# Altium PCB PCB1.PcbDoc (part 2 of 2)
Units mil, origin at the board's own origin, x right, y up, seen from the top; angles counter-clockwise.
Board outline 3297.75 x 2522.53 mil, 2 copper layers (Top Layer, Bottom Layer); 134 components, 99 nets, 411 pads, 89 vias.
Unrouted connection lines stored in the file: 1.
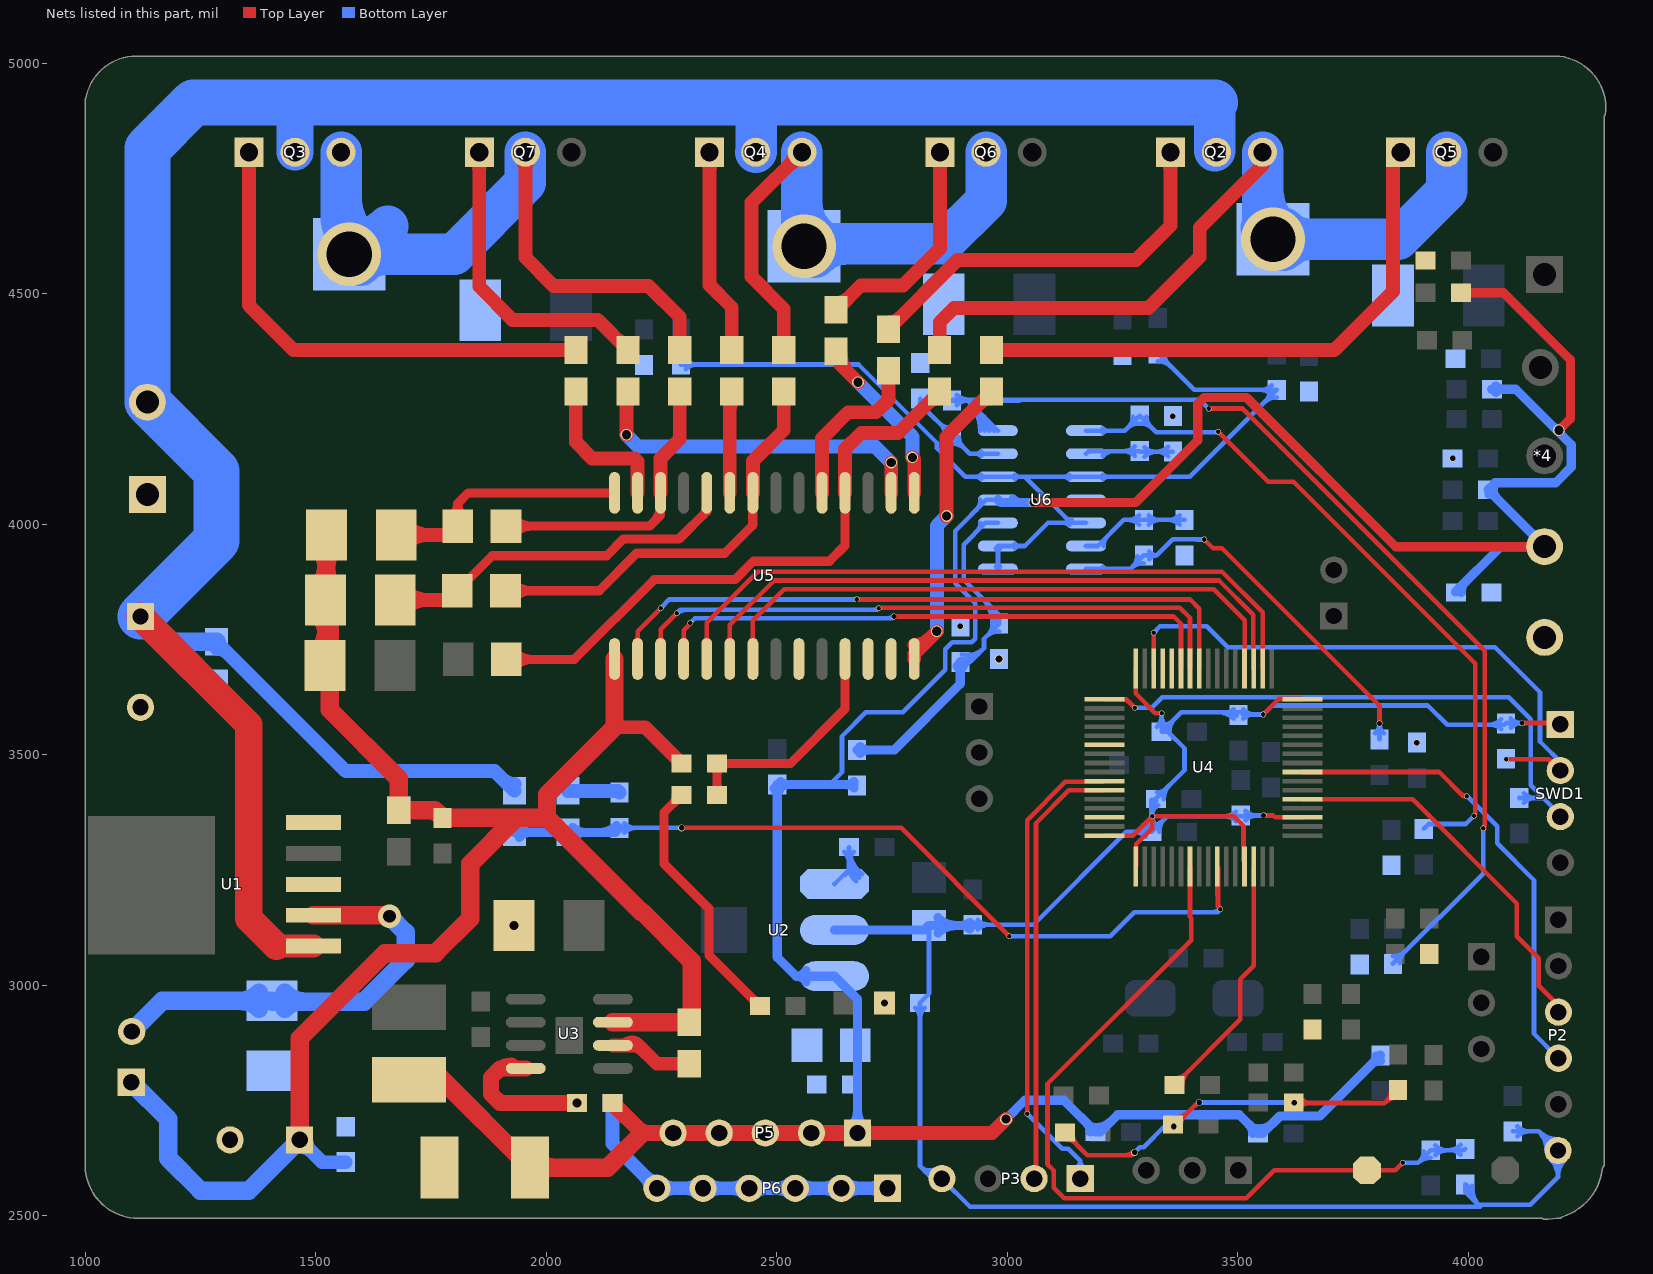
[diagram p2: the nets of this part, all layers, seen from the top]

## Via types
v1: diameter 12, hole 10, Top Layer to Bottom Layer, 49 vias
v2: diameter 15, hole 12, Top Layer to Bottom Layer, 13 vias
v3: diameter 25, hole 20, Top Layer to Bottom Layer, 9 vias
v4: diameter 15, hole 10, Top Layer to Bottom Layer, 7 vias
v5: diameter 20, hole 15, Top Layer to Bottom Layer, 3 vias
v6: diameter 137.8, hole 98.43, Top Layer to Bottom Layer, 3 vias
v7: diameter 27, hole 20, Top Layer to Bottom Layer, 1 vias
v8: diameter 20, hole 17, Top Layer to Bottom Layer, 1 vias
v9: diameter 25, hole 20, Top Layer to Bottom Layer, tented top, 1 vias
v10: diameter 50, hole 28, Top Layer to Bottom Layer, 1 vias
v11: diameter 30, hole 25, Top Layer to Bottom Layer, 1 vias

## Nets (pads, with @x,y where several pads share a name; then routed paths per layer and width w, separated by ;. In a path a pad name is that pad's centre, name@x,y a point inside that pad or via, vN(x,y) a via of type N, cw(c..) or ccw(c..) an arc to the next point about the centre after c; other vN are vias at no path point) (continued)
NetC29_2: C29.2 R31.1 U5.18 | length 1420.4
  Top Layer w20: C29.2@1913.33,3707 2061,3707 2234,3880 2409.2,3880 2449.2,3920 2614,3920 2648,3954 U5.18@2648,4068.12 ; C29.2@1929.92,3690.41 cw(c1969.98,3650.35) 1969.98,3707 cw(c1969.98,3763.65) C29.2@1929.92,3723.59
  Top Layer w30: U5.18@2648,4068.12 2648,4163 2683,4198 2763.25,4198 R31.1@2853.25,4288 ; 2827.64,4262.39 cw(c2853.25,4236.79) R31.1@2853.25,4273
NetC30_1: C30.1 D5.K U5.24 | length 922.2
  Top Layer w20: C30.1@1807,3856 1883,3932 2131,3932 2167,3968 2288,3968 2348,4028 U5.24@2348,4068.12 ; 2340.2,4020.2 ccw(c2325.75,4034.65) U5.24@2346.19,4034.65
  Top Layer w30: D5.K@1672.57,3836 1787,3836 C30.1@1807,3856 ; D5.K@1693.29,3815.29 cw(c1743.29,3765.28) 1743.29,3836 cw(c1743.29,3906.72) D5.K@1693.29,3856.71
NetC30_2: C30.2 R29.1 U5.22 | length 1002.2
  Top Layer w20: C30.2@1911.33,3856 2114.8,3856 2195.8,3937 2387,3937 2448,3998 U5.22@2448,4068.12 ; C30.2@1927.92,3839.41 cw(c1967.98,3799.35) 1967.98,3856 cw(c1967.98,3912.65) C30.2@1927.92,3872.59
  Top Layer w30: U5.22@2448,4068.12 2448,4137 2515,4204 R29.1@2515,4288
NetC31_1: C31.1 D6.K U5.28 | length 714
  Top Layer w20: C31.1@1794.21,4017.94 ccw(c1774.56,4045) 1808,4045 ; C31.1@1808,3996 1808,4045 ; C31.1@1821.79,4017.94 cw(c1841.44,4045) 1808,4045 ; U5.28@2148,4068.12 1831.12,4068.12 1808,4045
  Top Layer w30: D6.K@1674.57,3977 1789,3977 C31.1@1808,3996 ; D6.K@1695.29,3956.29 cw(c1745.29,3906.28) 1745.29,3977 cw(c1745.29,4047.72) D6.K@1695.29,3997.71
NetC31_2: C31.2 R27.1 U5.26 | length 751
  Top Layer w20: C31.2@1912.33,3996 2224,3996 2248,4020 U5.26@2248,4068.12 ; C31.2@1928.92,3979.41 cw(c1968.98,3939.35) 1968.98,3996 cw(c1968.98,4052.65) C31.2@1928.92,4012.59 ; 2234.55,4006.55 ccw(c2206.44,4034.65) U5.26@2246.19,4034.65
  Top Layer w30: U5.26@2248,4068.12 2248,4143 2289.5,4184.5 R27.1@2289.5,4288
NetC32_1: C32.1 R39.2 U5.11 | length 612.9
  Top Layer w20: C32.1@2363.62,3419.85 ccw(c2347.08,3436.38) 2370.46,3436.38 ccw(c2393.85,3436.38) C32.1@2377.31,3419.85 ; R39.2@2363.62,3474.15 cw(c2347.08,3457.62) 2370.46,3457.62 cw(c2393.85,3457.62) R39.2@2377.31,3474.15 ; C32.1@2370.46,3413 R39.2@2370.46,3481 2529,3481 2648,3600 U5.11@2648,3707.88 ; R39.2@2379.28,3474.15 cw(c2395.81,3457.62) 2395.81,3481 cw(c2395.81,3504.38) R39.2@2379.28,3487.85
NetC41_1: C41.1 R53.2 R55.1 U6.3 | length 1150.5
  Bottom Layer w10: C41.1@2896.76,3698.33 ccw(c2903.52,3726.56) 2924.04,3706.04 ; C41.1@2898,3701.54 2919.54,3701.54 ; C41.1@2899.09,3708.06 ccw(c2908.4,3746.95) 2936.68,3718.68 ; C41.1@2901.42,3717.79 ccw(c2913.28,3767.35) 2949.31,3731.31 ; C41.1@2911.67,3696.17 cw(c2919.53,3693.09) 2919.53,3701.54 ; C41.1@2911.67,3706.9 ccw(c2919.53,3709.98) 2919.53,3701.54 ; 2933.6,3984.6 ccw(c2915.2,4003) U6.3@2941.22,4003 ; 2945.22,3839.78 cw(c2891.87,3786.43) R55.1@2967.32,3786.43 ; 2953.57,3756.04 cw(c2982,3727.61) R55.1@2982,3767.81 ; 2958.32,3760.79 ccw(c2936.61,3782.5) R55.1@2967.32,3782.5 ; 2962.29,3822.71 cw(c2926.01,3786.43) R55.1@2977.32,3786.43 ; U6.3@2979.53,4003 2952,4003 2905,3956 2905,3880 2982,3803 R55.1@2982,3784.46 2949.31,3751.78 2949.31,3731.31 ; 2919.54,3701.54 2949.31,3731.31
  Bottom Layer w20: R53.2@2674,3510.46 2754.46,3510.46 2898,3654 C41.1@2898,3701.54 ; R53.2@2680.85,3503.62 cw(c2697.38,3487.08) 2697.38,3510.46 cw(c2697.38,3533.85) R53.2@2680.85,3517.31 ; C41.1@2891.15,3692.72 cw(c2874.62,3676.19) 2898,3676.19 cw(c2921.38,3676.19) C41.1@2904.85,3692.72
NetD2_K: D2.K L2.2 U1.2 | length 1119.1
  Top Layer w40: U1.2@1495,3152 1658,3152 v10(1660,3150)
  Bottom Layer w40: L2.2@1101,2900 1167.57,2966.57 D2.K@1405,2966.57 1406.57,2965 1605,2965 1695,3055 1695,3115 v10(1660,3150) ; D2.K@1377,2949.4 ccw(c1335.53,2907.93) 1335.53,2966.57 ccw(c1335.53,3025.22) D2.K@1377,2983.75 ; D2.K@1433,2949.4 cw(c1470.67,2911.73) 1470.67,2965 ; D2.K@1433,2983.75 ccw(c1478.27,3029.02) 1478.27,2965
NetD3_A: D3.A R1.1
  other v5: 2733.54,2962
NetR3_1: R3.1 R5.1 U3.4 | length 348.4
  Top Layer w35: 1892.73,2812.73 cw(c1924.02,2781.44) U3.4@1924.02,2825.69 ; U3.4@1955.51,2820 1900,2820 1880,2800 1880,2765 1900,2745 v3(2066.54,2745)
NetR26_1: R26.1 U5.27 | length 329.3
  Top Layer w30: R26.1@2064,4288 2064,4178 2099,4143 2191,4143 2198,4136 U5.27@2198,4068.12
NetR28_1: R28.1 U5.23 | length 252
  Top Layer w30: U5.23@2398,4068.12 2398,4283.75 R28.1@2402.25,4288 ; 2398,4248.6 cw(c2436.65,4248.6) R28.1@2409.32,4275.93
NetR30_1: R30.1 U5.19 | length 359.8
  Top Layer w30: U5.19@2598,4068.12 2598,4186.26 2654.74,4243 2715,4243 2742,4270 R30.1@2742,4333
NetR32_1: R32.1 U5.16 | length 786.2
  Top Layer w30: v3(2174,4194) 2174,4285.25 R32.1@2176.75,4288 ; 2174,4252.22 cw(c2207.53,4252.22) R32.1@2183.82,4275.93 ; U5.16@2748,4068.12 v3(2748,4134)
  Bottom Layer w30: v3(2174,4194) 2199,4169 2713,4169 v3(2748,4134)
NetR35_1: R35.1 U5.15 | length 422.8
  Top Layer w30: R35.1@2628,4375 2638,4365 2638,4346 v3(2676,4308) ; R35.1@2638,4370 ccw(c2695.94,4370) 2654.97,4329.03 ; v9(2794,4145) 2798,4141 U5.15@2798,4068.12
  Bottom Layer w30: v3(2676,4308) 2794,4190 v9(2794,4145)
NetR38_1: R38.1 U5.14 | length 714.5
  Top Layer w30: U5.14@2798,3707.88 2798,3719 v3(2847,3768) ; U5.14@2798,3738.16 ccw(c2798,3784.41) 2830.7,3751.7 ; v3(2868,4018) 2868,4190 R38.1@2966,4288 ; 2940.39,4262.39 cw(c2966,4236.79) R38.1@2966,4273
  Bottom Layer w30: v3(2847,3768) 2847,3997 v3(2868,4018)
NetR40_1: R40.1 R42.2 U6.7 | length 2735.4
  Top Layer w10: v1(3437,4251) 3510,4251 4035,3726 4035,3344 v1(4032,3341) v1@4034,3339 ; v1@4031.29,3341.71 ccw(c4022.34,3350.66) 4035,3350.66
  Bottom Layer w10: R40.1@2890.38,4260.05 cw(c2914.69,4235.74) 2914.69,4270.12 ; R40.1@2890.38,4280.82 ccw(c2916.21,4306.65) 2916.21,4270.12 ; R40.1@2890.68,4258.38 cw(c2914.06,4236.3) 2914.06,4268.46 ; R40.1@2890.68,4278.55 ccw(c2914.06,4300.62) 2914.06,4268.46 ; 2914.13,4268.39 cw(c2848.74,4203) U6.7@2941.22,4203 ; 2931.2,4251.32 cw(c2882.88,4203) U6.7@2951.22,4203 ; 2948.28,4234.25 cw(c2917.02,4203) U6.7@2961.22,4203 ; 2965.35,4217.18 cw(c2951.17,4203) U6.7@2971.22,4203 ; U6.7@2979.53,4203 2914.06,4268.46 ; 3026.54,4268.46 2914.06,4268.46 ; v1(3437,4251) 3417.88,4270.12 2881.65,4270.12 R40.1@2880,4268.46 2914.06,4268.46 ; R42.2@3836,3046.54 4032,3242.54 v1(4032,3341) ; R42.2@3836,3063.19 ccw(c3836,3103.39) 3864.43,3074.96 ; R42.2@3850.68,3048.5 cw(c3881.39,3048.5) 3859.68,3070.21
NetR40_2: R40.2 R41.1 U6.6 | length 362.3
  Bottom Layer w10: R41.1@2811,4272.54 2811,4260.54 R40.2@2880,4191.54 2918.54,4153 U6.6@2979.53,4153 ; 2851.57,4219.96 ccw(c2880,4248.39) R40.2@2880,4208.19 ; 2856.32,4215.21 cw(c2834.61,4193.5) R40.2@2865.32,4193.5 ; R40.2@2880,4174.88 cw(c2880,4134.68) 2908.43,4163.11 ; R40.2@2894.68,4189.57 ccw(c2925.39,4189.57) 2903.68,4167.86 ; U6.6@2943.22,4148.18 ccw(c2931.59,4136.56) 2931.59,4153 ccw(c2931.59,4169.44) U6.6@2943.22,4157.82
NetR50_1: R50.1 R52.2 U6.8 | length 1680.8
  Top Layer w10: v1(3457,4201) 3565.5,4092.5 3620.5,4092.5 4015,3698 4015,3371 v1(4012,3368) ; v1@4011.29,3368.71 ccw(c4002.34,3377.66) 4015,3377.66
  Bottom Layer w10: U6.8@3170.47,4203 3254.54,4203 R50.1@3287,4235.46 3322.65,4199.81 3455.81,4199.81 v1(3457,4201) ; U6.8@3206.78,4198.18 cw(c3218.41,4186.56) 3218.41,4203 cw(c3218.41,4219.44) U6.8@3206.78,4207.82 ; 3258.57,4207.04 cw(c3287,4178.61) 3287,4218.81 cw(c3287,4178.61) 3315.43,4207.04 ; 3263.32,4211.79 ccw(c3241.61,4233.5) R50.1@3272.32,4233.5 ; R50.1@3301.68,4233.5 ccw(c3332.39,4233.5) 3310.68,4211.79 ; R52.2@3903,3339.46 3913.54,3350 3994,3350 v1(4012,3368)
NetR50_2: R50.2 R51.1 U6.9 | length 386.1
  Bottom Layer w10: U6.9@3170.47,4153 3176.01,4158.54 R50.2@3287,4158.54 3288,4157.54 R51.1@3359,4157.54 ; U6.9@3206.78,4148.18 cw(c3231.78,4123.19) 3231.78,4158.54 ; R50.2@3276.62,4148.15 ccw(c3251.55,4123.08) 3251.55,4158.54 ccw(c3251.55,4193.99) R50.2@3276.62,4168.92 ; R50.2@3297.38,4146.18 cw(c3324.79,4118.78) 3324.79,4157.54 ; R50.2@3297.38,4166.95 ccw(c3320.11,4189.68) 3320.11,4157.54 ; R51.1@3348.62,4147.15 ccw(c3323.55,4122.08) 3323.55,4157.54 ccw(c3323.55,4192.99) R51.1@3348.62,4167.92
NetR56_1: R56.1 R58.2 U6.14 | length 1055.2
  Top Layer w10: v1(3427,3967) 3446,3948 3465.37,3948 3807,3606.37 v1(3807,3568) v1@3808,3569
  Bottom Layer w10: U6.14@3170.47,3903 3266.46,3903 R56.1@3296,3932.54 3324.28,3932.54 ; U6.14@3206.78,3898.18 cw(c3218.41,3886.56) 3218.41,3903 cw(c3218.41,3919.44) U6.14@3206.78,3907.82 ; 3267.57,3904.11 cw(c3296,3875.68) R56.1@3296,3915.88 ; 3272.32,3908.86 ccw(c3250.61,3930.57) R56.1@3281.32,3930.57 ; R56.1@3308.01,3924.09 cw(c3324.28,3912.66) 3324.28,3932.54 ; R56.1@3308.01,3940.98 ccw(c3324.28,3952.41) 3324.28,3932.54 ; v1(3427,3967) 3409.26,3967 3409.07,3967.19 3358.93,3967.19 3324.28,3932.54 ; R58.2@3797.28,3546.44 ccw(c3778.23,3568) v1(3807,3568) ; R58.2@3807,3533.46 v1(3807,3568) ; R58.2@3816.72,3546.44 cw(c3835.77,3568) v1(3807,3568)
NetR56_2: R56.2 R57.1 U6.13 | length 428.2
  Bottom Layer w10: U6.13@3170.47,3953 3196,3953 3252.46,4009.46 R56.2@3296,4009.46 R57.1@3384,4009.46 ; U6.13@3208.78,3953 cw(c3239.63,3953) 3217.82,3974.82 ; R56.2@3285.62,3999.08 ccw(c3260.55,3974.01) 3260.55,4009.46 ccw(c3260.55,4044.92) R56.2@3285.62,4019.85 ; R56.2@3306.38,3999.08 cw(c3331.45,3974.01) 3331.45,4009.46 cw(c3331.45,4044.92) R56.2@3306.38,4019.85 ; R57.1@3373.62,3999.08 ccw(c3348.55,3974.01) 3348.55,4009.46 ccw(c3348.55,4044.92) R57.1@3373.62,4019.85
PA11: U4.44
PA12: U4.45
PB8: 
PB9: U4.62
PD2: U4.54
PGND: *1.1 *4.5 C1.2 C3.2 C4.2 C5.2 C8.2 C9.2 C10.2 C12.1 C13.2 C23.1 C24.1 C25.1 C26.1 C27.1 C28.1 C32.2 C33.1 C34.2 C35.1 C36.1 C37.1 C38.1 C39.1 C40.2 C41.2 C42.1 C43.2 D1.A D2.A P6.1 P6.2 P6.3 P6.4 P6.5 P6.6 R4.1 R5.2 R7.1 R12.1 R13.1 R34.1 R36.1 R37.1 R41.2 R51.2 R55.2 R57.2 U1.3 U1.5 U2.1 U3.6 U5.9 U5.12 U5.13 U6.11 | length 3736.4
  Top Layer w10: C27.1@3124.54,2681 3173.54,2632 3270,2632 v2(3276,2638) ; C27.1@3126.5,2666.32 cw(c3126.5,2635.61) 3148.21,2657.32 ; C27.1@3141.19,2681 ccw(c3181.39,2681) 3152.96,2652.57 ; 3255.48,2632 ccw(c3255.48,2658.52) v2@3274.23,2639.77 ; C24.1@3357,2709 C24.1@3359.54,2709 ; v2(3361,2694) 3413,2746 v2(3416,2746) ; C24.1@3361.5,2712.68 ccw(c3361.5,2756.58) 3392.54,2725.54 ; C24.1@3376.19,2698 cw(c3403.2,2698) 3384.1,2717.1 ; 3406.61,2739.61 cw(c3416,2730.22) v2@3416,2743.5 ; v2(3622,2745) 3818.46,2745 C28.1@3847,2773.54 ; C23.1@3633.35,2735.62 cw(c3656.01,2712.96) 3656.01,2745 ; C23.1@3633.35,2756.38 ccw(c3660.84,2783.87) 3660.84,2745 ; 3818.57,2745.11 cw(c3847,2716.68) C28.1@3847,2756.88 ; 3823.32,2749.86 ccw(c3801.61,2771.57) C28.1@3832.32,2771.57
  Top Layer w20: 2273.64,3393.11 ccw(c2253.75,3413) C32.2@2281.88,3413 ; C32.2@2278.39,3397.86 cw(c2291.57,3384.69) C32.2@2291.57,3403.32 ; C32.2@2293.54,3413 2255,3374.46 2255,3264.24 2353,3166.24 2353,3065.54 R13.1@2463.54,2955 ; 2443.64,2974.89 cw(c2423.75,2955) R13.1@2451.88,2955 ; R13.1@2448.39,2970.14 ccw(c2461.57,2983.31) R13.1@2461.57,2964.68
  Top Layer w30: U3.6@2144.49,2870 2200,2870 ; U3.6@2174.24,2872.67 cw(c2185.48,2855.48) 2200,2870 ; U3.6@2175.98,2873.19 cw(c2175.98,2822.91) 2211.54,2858.46 ; C12.1@2310,2830 2240,2830 2200,2870
  Bottom Layer w10: U2.1@2625.06,3219.97 2656.54,3251.44 R12.1@2656.54,3300 ccw(c2731.42,3300) U2.1@2684.71,3241.46 ; R12.1@2646.15,3289.62 cw(c2621.08,3264.55) 2656.54,3264.55 cw(c2691.99,3264.55) R12.1@2666.92,3289.62 ; U2.1@2648.12,3239.41 ccw(c2627.8,3259.73) 2656.54,3259.73 ; 2656.54,3258.45 ccw(c2698.27,3258.45) U2.1@2672.24,3225.83 ; 2656.54,3279.22 ccw(c2714.84,3279.22) U2.1@2678.48,3233.65 ; v2(3276,2638) 3287.31,2649.31 3295.5,2649.31 3342.87,2696.69 3358.31,2696.69 v2(3361,2694) ; 3348.48,2696.69 cw(c3348.48,2681.48) v2@3359.23,2692.23 ; v2(3416,2746) 3621,2746 v2(3622,2745) ; 3613.55,2746 cw(c3613.55,2736.55) v2@3620.23,2743.23
  Bottom Layer w30: R7.1@2047,3421.87 2155.59,3421.87 C13.2@2159,3418.46 ; R5.2@2143.46,2745 2143.46,2656.54 P6.6@2240,2560 P6.5@2340,2560 P6.4@2440,2560 P6.3@2540,2560 P6.2@2640,2560 P6.1@2740,2560 ; P6.6@2225.47,2560 ccw(c2190.4,2560) 2215.2,2584.8 ccw(c2240,2609.6) P6.6@2240,2574.53 ; P6.6@2250.27,2549.73 cw(c2275.07,2524.93) 2275.07,2560 cw(c2275.07,2595.07) P6.6@2250.27,2570.27 ; P6.5@2329.73,2549.73 ccw(c2304.93,2524.93) 2304.93,2560 ccw(c2304.93,2595.07) P6.5@2329.73,2570.27 ; P6.5@2350.27,2549.73 cw(c2375.07,2524.93) 2375.07,2560 cw(c2375.07,2595.07) P6.5@2350.27,2570.27 ; P6.4@2429.73,2549.73 ccw(c2404.93,2524.93) 2404.93,2560 ccw(c2404.93,2595.07) P6.4@2429.73,2570.27 ; P6.4@2450.27,2549.73 cw(c2475.07,2524.93) 2475.07,2560 cw(c2475.07,2595.07) P6.4@2450.27,2570.27 ; P6.3@2529.73,2549.73 ccw(c2504.93,2524.93) 2504.93,2560 ccw(c2504.93,2595.07) P6.3@2529.73,2570.27 ; P6.3@2550.27,2549.73 cw(c2575.07,2524.93) 2575.07,2560 cw(c2575.07,2595.07) P6.3@2550.27,2570.27 ; P6.2@2629.73,2549.73 ccw(c2604.93,2524.93) 2604.93,2560 ccw(c2604.93,2595.07) P6.2@2629.73,2570.27 ; P6.2@2650.27,2549.73 cw(c2675.07,2524.93) 2675.07,2560 cw(c2675.07,2595.07) P6.2@2650.27,2570.27 ; P6.1@2729.73,2549.73 ccw(c2704.93,2524.93) 2704.93,2560 ccw(c2704.93,2595.07) P6.1@2729.73,2570.27
  other v2: 3888,3526.46 2898,3778.46 3965.54,4143 3359,4234.46
  other v5: 2982,3707.54
  other v7: 1930,3130
PWM1H: U4.41 U5.2 | length 1469.6
  Top Layer w10: U5.2@2193.18,3746.16 ccw(c2181.56,3757.79) 2198,3757.79 ccw(c2214.44,3757.79) U5.2@2202.82,3746.16 ; U5.2@2198,3707.88 2198,3768 v1(2248,3818) ; v1@2674,3837 3396,3837 3415.79,3817.21 U4.41@3415.79,3687.13
  Bottom Layer w10: v1(2248,3818) 2267,3837 v1(2673,3837)
PWM1H_I: Q7.G R32.2 | length 761.5
  Top Layer w30: Q7.G@1843.05,4795.19 cw(c1814.88,4767.03) 1854.71,4767.03 cw(c1894.53,4767.03) Q7.G@1866.37,4795.19 ; Q7.G@1854.71,4806.86 1854.71,4515.29 1927,4443 2111.75,4443 R32.2@2176.75,4378 ; 2151.14,4403.61 ccw(c2176.75,4429.21) R32.2@2176.75,4393
PWM1H_N: pad.0 Q3.S Q7.D R27.2 | length 2202.7
  Top Layer w30: Q7.D@1943.05,4795.19 cw(c1914.88,4767.03) 1954.71,4767.03 cw(c1994.53,4767.03) Q7.D@1966.37,4795.19 ; Q7.D@1954.71,4806.86 1954.71,4578.29 2016,4517 2222,4517 2289.5,4449.5 R27.2@2289.5,4378
  Bottom Layer w90: 1555.14,4686.82 ccw(c1673.82,4686.82) pad.0@1589.9,4602.9 ; 1555.14,4710.58 ccw(c1697.58,4710.58) 1596.86,4609.86 ccw(c1654.46,4667.46) 1654.46,4586 ccw(c1654.46,4504.54) pad.0@1596.86,4562.14 ; Q3.S@1555.14,4806.86 1555.14,4671 ; v6(1573,4586) 1596,4586 1656,4646 cw(c1589.89,4712.11) pad.0@1577.48,4619.44 ; pad.0@1573,4609.9 ccw(c1573,4723.12) 1653.06,4643.06 ; pad.0@1587.6,4604.92 cw(c1638.62,4671) 1555.14,4671 ; pad.0@1588.57,4615.93 cw(c1617.2,4671) 1555.14,4671 ; pad.0@1597.16,4562.45 cw(c1653,4508.04) 1653,4586 ; pad.0@1597.16,4609.55 ccw(c1653,4663.96) 1653,4586 ; Q7.D@1954.71,4806.86 1954.71,4740.71 1800,4586 1653,4586
PWM1H_O: Q3.G R26.2 | length 1143.5
  Top Layer w30: Q3.G@1343.47,4795.19 cw(c1315.31,4767.03) 1355.14,4767.03 cw(c1394.96,4767.03) Q3.G@1366.8,4795.19 ; Q3.G@1355.14,4806.86 1355.14,4474.86 1452,4378 R26.2@2064,4378
PWM1L: U4.34 U5.5 | length 1513.9
  Top Layer w10: U5.5@2343.18,3746.16 ccw(c2331.56,3757.79) 2348,3757.79 ccw(c2364.44,3757.79) U5.5@2352.82,3746.16 ; U5.5@2348,3707.88 2348,3786.28 2458.72,3897 3465.46,3897 3553.59,3808.87 U4.34@3553.59,3687.13
PWM2H: U4.42 U5.3 | length 1409.7
  Top Layer w10: U5.3@2243.18,3746.16 ccw(c2231.56,3757.79) 2248,3757.79 ccw(c2264.44,3757.79) U5.3@2252.82,3746.16 ; U5.3@2248,3707.88 2248,3772 v1(2283,3807) ; v1(2721,3818) 2722,3819 3374,3819 3396.11,3796.89 U4.42@3396.11,3687.13
  Bottom Layer w10: v1(2283,3807) 2290.5,3814.5 2717.5,3814.5 v1(2721,3818) ; v1@2283.71,3806.29 cw(c2303.52,3786.48) 2303.52,3814.5 ; 2710.14,3814.5 ccw(c2710.14,3828.86) v1@2720.29,3818.71
PWM2H_I: Q6.G R35.2 | length 581.8
  Top Layer w30: R35.2@2628,4480 ccw(c2628,4518.63) 2655.31,4491.31 ; R35.2@2629,4465 2682,4518 2774,4518 2853.85,4597.85 Q6.G@2853.85,4806.86 ; Q6.G@2842.19,4795.19 cw(c2814.03,4767.03) 2853.85,4767.03 cw(c2893.68,4767.03) Q6.G@2865.52,4795.19
PWM2H_N: pad.1 Q4.S Q6.D R29.2 | length 1583
  Top Layer w30: R29.2@2515,4378 2515,4467 2445,4537 2445,4697.58 Q4.S@2554.28,4806.86 ; Q4.S@2537.79,4806.86 cw(c2497.96,4806.86) 2526.12,4778.7 cw(c2554.28,4750.54) Q4.S@2554.28,4790.36
  Bottom Layer w90: pad.1@2554.28,4672.09 ccw(c2628.09,4672.09) pad.1@2575.9,4619.9 ; 2554.28,4695.85 ccw(c2651.85,4695.85) pad.1@2582.86,4626.86 ; Q4.S@2554.28,4806.86 2554.28,4607.72 v6(2559,4603) 2564,4608 2860,4608 2953.85,4701.85 Q6.D@2953.85,4806.86 ; pad.1@2575.9,4586.1 cw(c2628.76,4533.23) pad.1@2628.76,4608 ; pad.1@2582.86,4579.14 cw(c2652.53,4509.47) 2652.53,4608
PWM2H_O: Q4.G R28.2 | length 511.3
  Top Layer w30: Q4.G@2342.62,4795.19 cw(c2314.46,4767.03) 2354.28,4767.03 cw(c2394.11,4767.03) Q4.G@2365.95,4795.19 ; Q4.G@2354.28,4806.86 2354.28,4518.72 2402.25,4470.75 R28.2@2402.25,4378
PWM2L: U4.35 U5.6 | length 1422.6
  Top Layer w10: U5.6@2393.18,3746.16 ccw(c2381.56,3757.79) 2398,3757.79 ccw(c2414.44,3757.79) U5.6@2402.82,3746.16 ; U5.6@2398,3707.88 2398,3782 2494,3878 3459,3878 3533.04,3803.96 3533.04,3688 U4.35@3533.9,3687.13
PWM3H: U4.43 U5.4 | length 1294.5
  Top Layer w10: U5.4@2293.18,3746.16 ccw(c2281.56,3757.79) 2298,3757.79 ccw(c2314.44,3757.79) U5.4@2302.82,3746.16 ; U5.4@2298,3707.88 2298,3770 v1@2313,3785 ; v1(2754,3800) 3361,3800 3376.42,3784.58 U4.43@3376.42,3687.13
  Bottom Layer w10: v1(2312,3786) 2322.5,3796.5 2750.5,3796.5 v1(2754,3800) ; 2743.14,3796.5 ccw(c2743.14,3810.86) v1@2753.29,3800.71
PWM3H_I: Q5.G R38.2 | length 1231.5
  Top Layer w30: R38.2@2966,4378 3709,4378 3836,4505 3836,4789.86 Q5.G@3853,4806.86
PWM3H_N: pad.2 Q2.S Q5.D R31.2 | length 1914.6
  Top Layer w30: R31.2@2853.25,4378 2853.25,4438.25 2884,4469 3306,4469 3417,4580 3417,4643 3553.42,4779.42 Q2.S@3553.42,4806.86
  Bottom Layer w90: pad.2@3550.42,4643.58 pad.2@3553.42,4640.58 ; pad.2@3553.42,4632.58 pad.2@3553.42,4640.58 ; 3553.42,4730.2 ccw(c3688.2,4730.2) pad.2@3592.9,4634.9 ; Q2.S@3553.42,4806.86 pad.2@3553.42,4640.58 ; pad.2@3599.86,4594.14 cw(c3657.46,4536.54) 3657.46,4618 cw(c3657.46,4699.46) pad.2@3599.86,4641.86 ; Q5.D@3953,4806.86 3953,4723.07 3847.93,4618 v6(3576,4618) pad.2@3553.42,4640.58
PWM3H_O: Q2.G R30.2 | length 954.8
  Top Layer w30: R30.2@2742,4423 2892,4573 3279,4573 3353.42,4647.42 Q2.G@3353.42,4806.86 ; R30.2@2742,4438 ccw(c2742,4474.21) 2767.61,4448.61 ; Q2.G@3341.76,4795.19 cw(c3313.6,4767.03) 3353.42,4767.03 cw(c3393.25,4767.03) Q2.G@3365.09,4795.19
PWM3L: U4.36 U5.7 | length 1336.7
  Top Layer w10: U5.7@2443.18,3746.16 ccw(c2431.56,3757.79) 2448,3757.79 ccw(c2464.44,3757.79) U5.7@2452.82,3746.16 ; U5.7@2448,3707.88 2448,3790.87 2516.13,3859 3447.53,3859 3515.04,3791.49 3515.04,3687.95 U4.36@3514.22,3687.13
RESET: *2.2 C14.1 R8.1 U4.7 | length 1944.7
  Top Layer w10: U4.7@3396.11,3258 3396.11,3148.76 3399,3145.87 3399,3098.19 3086.88,2786.07 3086.88,2612.26 3100.53,2598.62 3100.53,2561.03 3123.09,2538.47 3517.91,2538.47 3578.44,2599 *2.2@3780,2599 3841,2599 v1(3857,2615)
  Bottom Layer w10: v1(3857,2615) 3890.54,2615 ; 3894.32,2618.79 ccw(c3872.61,2640.5) C14.1@3903.32,2640.5 ; C14.1@3917.62,2625.82 ccw(c3916.68,2588.86) 3890.54,2615 ; C14.1@3928.38,2632.08 cw(c3953.45,2607.01) 3953.45,2642.46 cw(c3953.45,2677.92) C14.1@3928.38,2652.85 ; 3955.06,2642.46 ccw(c3955.06,2681.44) R8.1@3982.62,2653.88 ; 3960.04,2642.46 cw(c3960.04,2610.53) R8.1@3982.62,2633.11 ; R8.1@3993,2645.46 3990,2642.46 C14.1@3918,2642.46 3890.54,2615
RX_1: P3.2 U4.59 | length 972.9
  Top Layer w10: P3.2@3059,2559 3062,2562 3062,3352 3133.35,3423.35 U4.59@3211.07,3423.35
SCK: P2.3 U4.21 | length 831.3
  Top Layer w10: U4.21@3640.2,3403.67 3878.88,3403.67 4105,3177.54 4105,3106.54 4152.47,3059.07 4152.47,2999.47 4195,2956.94 P2.3@4195,2942
SPEED: R18.2 U4.14 | length 600.7
  Top Layer w10: R18.2@3362.54,2784 3505,2926.46 3505,3013.46 3533.91,3042.36 U4.14@3533.91,3258 ; R18.2@3364.5,2798.68 ccw(c3364.5,2829.39) 3386.21,2807.68 ; R18.2@3379.19,2784 cw(c3419.39,2784) 3390.96,2812.43
"SPI NSS": P2.4 U4.24 | length 1043.7
  Top Layer w10: U4.24@3640.2,3462.72 3936.28,3462.72 3989,3410 v1(3996,3410) ; 3982.34,3416.66 ccw(c3996,3430.31) v1@3996,3411
  Bottom Layer w10: v1(3996,3410) 3996.87,3410 4062,3344.87 4062,3308 4142,3228 4142,2895 P2.4@4195,2842
SWCLK: R10.2 SWD1.3 U4.49 | length 1324.5
  Top Layer w10: U4.49@3211.07,3620.2 3258.08,3620.2 v1(3276,3602.28) ; U4.49@3249.38,3620.2 cw(c3249.38,3599.2) 3264.23,3614.05
  Bottom Layer w10: v1(3276,3602.28) 3313.28,3602.28 3336,3625 4086.87,3625 4135,3576.87 4135,3434 4162.54,3406.46 ; R10.2@4110,3406.46 4162.54,3406.46 ; R10.2@4120.38,3396.08 cw(c4145.45,3371.01) 4145.45,3406.46 cw(c4145.45,3441.92) R10.2@4120.38,3416.85 ; SWD1.3@4203,3366 4162.54,3406.46
SWDIO: R9.1 SWD1.2 U4.46 | length 1333.3
  Top Layer w10: v1(3317,3765) 3317.37,3764.63 U4.46@3317.37,3687.13 ; v1(4082,3490.54) 4174.46,3490.54 ; SWD1.2@4176.86,3476.56 ccw(c4165.78,3481.85) 4174.47,3490.53 ; SWD1.2@4188.44,3488.14 cw(c4183.15,3499.22) 4174.47,3490.53 ; SWD1.2@4195.46,3466 SWD1.2@4199,3466 4174.46,3490.54
  Bottom Layer w10: v1(3317,3765) 3331,3779 3432.01,3779 3477.51,3733.5 4057.5,3733.5 4155,3636 4155,3528.94 4203,3480.94 SWD1.2@4203,3466 ; R9.1@4081,3491.54 v1(4082,3490.54)
TX_1: P3.1 U4.58 | length 1077.9
  Top Layer w10: v1(3043,2722) 3043,3358.46 3125.9,3441.35 3209.38,3441.35 U4.58@3211.07,3443.04
  Bottom Layer w10: v1(3043,2722) 3119,2646 3132,2646 3158,2620 ; P3.1@3147.38,2603.11 ccw(c3139.26,2620) 3158,2620 ; P3.1@3158,2581 3158,2620 ; P3.1@3168.62,2603.11 cw(c3176.74,2620) 3158,2620
V_BUS: C13.1 R6.1 R7.2 U4.10 | length 2111.9
  Top Layer w10: v2(2293.54,3341.54) 2769.46,3341.54 v1(3004,3107) ; 3455.17,3197.17 U4.10@3455.17,3258 3456.85,3256.32 3456.85,3170.15 v1(3462,3165) ; 3456.85,3179.85 ccw(c3476.85,3179.85) v1@3462.71,3165.71
  Bottom Layer w10: C13.1@2159,3341.54 v2(2293.54,3341.54) ; C13.1@2169.38,3331.15 cw(c2194.45,3306.08) 2194.45,3341.54 cw(c2194.45,3376.99) C13.1@2169.38,3351.92 ; v1(3004,3107) 3223,3107 3275,3159 3456,3159 v1(3462,3165) ; 3445.1,3159 ccw(c3445.1,3181.9) v1@3461.29,3165.71
  Bottom Layer w20: R6.1@1931,3332 2046.87,3332 R7.2@2047,3331.87 2149.34,3331.87 C13.1@2159,3341.54 ; R6.1@1941.61,3321.39 cw(c1967.21,3295.79) 1967.21,3332 cw(c1967.21,3368.21) R6.1@1941.61,3342.61 ; 2010.48,3332 cw(c2010.48,3295.36) R7.2@2036.39,3321.27 ; 2011.09,3332 ccw(c2011.09,3367.78) R7.2@2036.39,3342.48 ; R7.2@2057.61,3321.27 cw(c2083.21,3295.66) 2083.21,3331.87 cw(c2083.21,3368.09) R7.2@2057.61,3342.48 ; 2117.05,3331.87 ccw(c2117.05,3381.52) C13.1@2152.15,3346.42
VCC-3.3: C2.1 C7.1 C17.2 C18.1 C19.1 C20.2 C21.1 C22.2 P2.6 P3.4 R1.2 R8.2 R9.2 SWD1.1 U2.2 U4.1 U4.13 U4.19 U4.32 U4.48 U4.64 | length 6888.7
  Top Layer w10: U4.64@3211.07,3324.93 3271.93,3324.93 v1(3314,3367) ; U4.1@3278,3258 3279.69,3259.69 3279.69,3306.69 3314,3341.01 v1(3314,3367) ; U4.48@3278,3687.13 3278,3633 3320.54,3590.46 v1(3334.54,3590.46) ; U4.13@3514.22,3268 3512,3270.22 3512,3346 3491,3367 v1(3314,3367) ; v1(3554.46,3587.46) 3587,3620 3588,3620 3589,3621 3639.41,3621 U4.32@3640.2,3620.2 ; v1(3555.46,3368.54) 3576.46,3368.54 3580.7,3364.3 U4.19@3640.21,3364.3 ; v1(4116,3569) 4196,3569 SWD1.1@4199,3566
  Bottom Layer w10: R1.2@2800.08,2951.62 cw(c2775.01,2926.55) 2810.46,2926.55 cw(c2845.92,2926.55) R1.2@2820.85,2951.62 ; 2819.87,2598.13 ccw(c2838.36,2616.62) P3.4@2850.98,2593.72 ; 2829.28,2588.72 ccw(c2845.05,2604.49) P3.4@2855.81,2584.96 ; C2.1@2830,3130 2830,2981.54 R1.2@2810.46,2962 2810.46,2607.54 ; P3.4@2846.16,2602.48 cw(c2831.67,2628.74) 2810.47,2607.53 ; P3.4@2858,2581 2919,2520 4025,2520 ; P3.4@2859,2559 2810.46,2607.54 ; C7.1@2925,3131.54 3056.54,3131.54 3258,3333 C19.1@3312.54,3333 C19.1@3314,3334.46 ; C7.1@2935.38,3121.15 cw(c2960.45,3096.08) 2960.45,3131.54 cw(c2960.45,3166.99) C7.1@2935.38,3141.92 ; C19.1@3300.18,3322.62 ccw(c3275.11,3297.55) 3275.11,3333 ccw(c3275.11,3368.45) C19.1@3300.18,3343.38 ; C19.1@3304.17,3343.44 ccw(c3280.84,3367) v1(3314,3367) ; v1@3312.54,3366.14 cw(c3340.76,3366.14) C20.2@3327.48,3391.04 ; v1@3312.54,3367 3312.54,3403 3320,3403 3384,3467 3384,3514 3348,3550 C22.2@3334.54,3550 ; 3312.54,3372.95 ccw(c3319.95,3372.95) v1@3314.71,3367.71 ; 3312.54,3382.81 cw(c3331.87,3382.81) C20.2@3322.77,3399.87 ; C19.1@3314.5,3347.68 ccw(c3314.5,3378.39) 3336.21,3356.68 ; C22.2@3324.15,3560.38 ccw(c3299.08,3585.45) 3334.54,3585.45 ccw(c3369.99,3585.45) C22.2@3344.92,3560.38 ; C19.1@3324.3,3343.94 cw(c3344.96,3367) v1(3314,3367) ; C20.2@3324.5,3418.69 ccw(c3324.5,3445.68) 3343.59,3426.59 ; C19.1@3329.19,3333 cw(c3369.39,3333) 3340.96,3361.43 ; v1(3334.54,3590.46) C22.2@3334.54,3550 ; C22.2@3336.5,3564.68 ccw(c3336.5,3595.39) 3358.21,3573.68 ; C20.2@3339.19,3404 cw(c3383.1,3404) 3352.05,3435.05 ; C22.2@3351.19,3550 cw(c3391.39,3550) 3362.96,3578.43 ; 3455.81,3592.46 cw(c3455.81,3543.25) C21.1@3490.62,3578.05 ; 3469.5,3367 cw(c3469.5,3330.07) C18.1@3495.62,3356.18 ; 3471.59,3367 ccw(c3471.59,3400.97) C18.1@3495.62,3376.95 ; 3475.28,3592.46 ccw(c3475.28,3614.15) C21.1@3490.62,3598.82 ; 3479.96,3592.46 cw(c3479.96,3567.39) C21.1@3497.69,3585.12 ; C21.1@3511,3587.46 v1(3554.46,3587.46) 3574,3607 3912,3607 3954,3565 R9.2@4077.54,3565 ; C21.1@3511,3592.46 3377,3592.46 C22.2@3334.54,3550 ; C21.1@3511.38,3578.05 cw(c3534.11,3555.32) 3534.11,3587.46 ; C21.1@3511.38,3598.82 ccw(c3538.79,3626.22) 3538.79,3587.46 ; C18.1@3514,3368.54 v1(3555.46,3368.54) ; C18.1@3516.38,3358.15 cw(c3541.45,3333.08) 3541.45,3368.54 cw(c3541.45,3403.99) C18.1@3516.38,3378.92 ; C18.1@3517.99,3375.05 ccw(c3533.53,3386.04) 3533.53,3367 ; C18.1@3518.39,3358.69 cw(c3533.53,3349.05) 3533.53,3367 ; R8.2@3993,2568.54 3993,2552 4025,2520 ; R8.2@3997.68,2566.29 ccw(c4037.45,2563.9) 4009.28,2535.72 ; R8.2@4007.66,2565.69 ccw(c4067.12,2562.12) 4025,2520 ; 4021,2524 4134,2524 4194,2584 ; 4041.94,3565 ccw(c4041.94,3605.56) R9.2@4070.62,3576.88 ; 4049.16,3565 cw(c4049.16,3534.66) R9.2@4070.62,3556.11 ; R9.2@4081,3568.46 4081.54,3569 v1(4116,3569) ccw(c4116,3535.84) R9.2@4091.74,3558.45 ; R9.2@4091.38,3578.85 ccw(c4115.16,3602.62) v1@4115.16,3569 ; C17.2@4096,2683.54 4152.46,2683.54 ; C17.2@4106.38,2673.15 cw(c4131.45,2648.08) 4131.45,2683.54 cw(c4131.45,2718.99) C17.2@4106.38,2693.92 ; P2.6@4169.47,2642.14 ccw(c4111.41,2642.47) 4152.47,2683.53 ; P2.6@4176.92,2624.4 cw(c4137.69,2584) 4194,2584 ; P2.6@4179.47,2642.08 ccw(c4145.08,2642.28) 4169.4,2666.6 ccw(c4193.72,2690.92) P2.6@4193.92,2656.53 ; P2.6@4183.88,2631.58 cw(c4160.65,2607.65) 4194,2607.65 cw(c4227.35,2607.65) P2.6@4204.12,2631.58 ; P2.6@4193.86,2666.53 cw(c4193.53,2724.59) 4152.47,2683.53 ; P2.6@4211.08,2624.4 ccw(c4250.31,2584) 4194,2584 ; C19.1@3314,3334.46 3346.54,3367 3533.54,3367 ; C19.1@3314,3334.46 v1(3314,3367) ; 4152.46,2683.54 P2.6@4194,2642 4194,2584
  Bottom Layer w20: U2.2@2625.06,3119.97 2819.97,3119.97 C2.1@2830,3130 2923.46,3130 C7.1@2925,3131.54 ; C2.1@2849.54,3113.41 cw(c2889.6,3073.35) 2889.6,3130 cw(c2889.6,3186.65) C2.1@2849.54,3146.59 ; 2900.57,3130 cw(c2900.57,3105.14) C7.1@2918.15,3122.72 ; 2902.66,3130 ccw(c2902.66,3151.9) C7.1@2918.15,3136.42
VCC-5: *4.4 C1.1 C5.1 C10.1 C38.2 L1.2 P5.1 P5.2 P5.3 P5.4 P5.5 R3.2 R16.2 R21.2 R24.2 R33.1 R44.1 R45.1 R46.1 R53.1 U2.3 U6.4 | length 7934.9
  Top Layer w20: v8(3056,4047) 3278,4047 3413,4182 3413,4260.94 3427.06,4275 3518.53,4275 3842.08,3951.45 *4.4@4165,3951.45 ; R44.1@3983.46,4502 4076.02,4502 4221,4357.02 4221,4229 v3(4196,4204) v3@4196,4200 ; R44.1@3992.28,4495.15 cw(c4008.81,4478.62) 4008.81,4502 cw(c4008.81,4525.38) R44.1@3992.28,4508.85
  Top Layer w30: P5.1@2675,2680 2967,2680 v3(2997,2710) ; P5.1@2685.27,2669.73 cw(c2710.07,2644.93) 2710.07,2680 cw(c2710.07,2715.07) P5.1@2685.27,2690.27
  Top Layer w35: R3.2@2143.46,2745 2208.46,2680 P5.5@2275,2680 P5.4@2375,2680 P5.3@2475,2680 P5.2@2575,2680 P5.1@2675,2680
  Top Layer w40: L1.2@1740,2806.26 1763.74,2806.26 C1.1@1965,2605 2133.46,2605 2208.46,2680 ; C1.1@1980.09,2589.91 cw(c2016.52,2553.48) 2016.52,2605 cw(c2016.52,2656.52) C1.1@1980.09,2620.09
  Bottom Layer w10: 2615,3435.54 2641.31,3461.85 2641.31,3540.31 2693,3592 2773,3592 2865.31,3684.31 2865.31,3728.57 2880.55,3743.81 2923.07,3743.81 2930.69,3751.43 2930.69,3828.86 2887,3872.54 2887,3985.46 2954.54,4053 U6.4@2979.53,4053 ; 2931.8,4030.25 ccw(c2909.05,4053) U6.4@2941.22,4053
  Bottom Layer w20: R33.1@2494.15,3426.72 cw(c2477.62,3410.19) 2501,3410.19 cw(c2524.38,3410.19) R33.1@2507.85,3426.72 ; R33.1@2507.85,3428.69 cw(c2524.38,3412.15) 2524.38,3435.54 cw(c2524.38,3458.92) R33.1@2507.85,3442.38 ; U2.3@2563.47,3008.07 ccw(c2542.03,2994.71) 2542.03,3019.97 ; U2.3@2563.47,3031.87 cw(c2542.03,3045.22) 2542.03,3019.97 ; 2650.54,3435.54 cw(c2650.54,3412.05) R53.1@2667.15,3428.66 ; 2650.69,3435.54 ccw(c2650.69,3458.81) R53.1@2667.15,3442.35 ; P5.1@2661.19,2693.81 ccw(c2627.86,2727.14) 2675,2727.14 ccw(c2722.14,2727.14) P5.1@2688.81,2693.81 ; R53.1@2667.54,3435.54 2615,3435.54 R33.1@2501,3435.54 2501,3061 2542.03,3019.97 ; P5.1@2675,2680 2675,2970.03 U2.3@2625.06,3019.97 2542.03,3019.97 ; U6.4@2979.53,4053 2985.53,4047 v8(3056,4047) ; v3(2997,2710) 3038,2751 3122.54,2751 R21.2@3191.54,2682 3201.67,2682 3239.36,2719.69 3502.85,2719.69 R16.2@3543.54,2679 3553.67,2679 3591.36,2716.69 3677.22,2716.69 R24.2@3809,2848.46 ; U6.4@3012.3,4054.28 ccw(c3029.88,4071.86) 3029.88,4047 ; 3171.64,2701.89 cw(c3151.75,2682) R21.2@3179.88,2682 ; R21.2@3176.39,2697.14 ccw(c3189.57,2710.31) R21.2@3189.57,2691.68 ; R21.2@3193.5,2691.68 ccw(c3193.5,2734.78) 3223.98,2704.31 ; 3523.64,2698.89 cw(c3503.75,2679) R16.2@3531.88,2679 ; R16.2@3528.39,2694.14 ccw(c3541.57,2707.31) R16.2@3541.57,2688.68 ; R16.2@3545.5,2688.68 ccw(c3545.5,2731.78) 3575.98,2701.31 ; 3789.11,2828.57 cw(c3809,2808.68) R24.2@3809,2836.81 ; R24.2@3793.86,2833.32 ccw(c3780.69,2846.5) R24.2@3799.32,2846.5 ; C38.2@3971.54,3853 4069.98,3951.45 *4.4@4165,3951.45 4165,3952.46 R46.1@4042.46,4075 4057.76,4090.3 4189.02,4090.3 4223,4124.27 4223,4172.32 4102.32,4293 R45.1@4050.46,4293 ; C38.2@3984.19,3852 cw(c4017.15,3852) 3993.84,3875.31 ; R46.1@4044.43,4065.32 cw(c4044.43,4046.69) R46.1@4057.61,4059.86 ; R46.1@4054.12,4075 ccw(c4082.25,4075) 4062.36,4055.11 ; R45.1@4059.28,4286.15 cw(c4075.81,4269.62) 4075.81,4293 cw(c4075.81,4316.38) R45.1@4059.28,4299.85 ; 4183.75,4211.57 ccw(c4196,4223.83) v3@4196,4206.5 ; v3@4198.5,4204 ccw(c4215.83,4204) 4203.57,4191.75
VCC-15: C6.1 C8.1 C9.1 C12.2 D4.A D5.A D6.A L2.1 R2.2 R39.1 U3.7 U5.1 | length 4695.8
  Top Layer w30: 2148,3560 2214.54,3560 R39.1@2293.54,3481
  Top Layer w40: C8.1@1465,2665 1465,2885 1650,3070 1760,3070 1835,3145 1835,3263.46 1935,3363.46 ; D5.A@1503.82,3864 ccw(c1457.53,3910.3) 1523,3910.3 ; D6.A@1505.82,3949 cw(c1464.36,3907.53) 1523,3907.53 cw(c1581.64,3907.53) D6.A@1540.18,3949 ; D4.A@1512.03,3727.77 ccw(c1504.33,3749.94) 1526.99,3756.02 ; D4.A@1523,3709 D6.A@1523,3992 ; 1523,3756.23 ccw(c1571.4,3756.23) D4.A@1537.18,3722 ; 1523,3761.7 ccw(c1457.53,3761.7) 1503.82,3808 cw(c1440.63,3744.8) D4.A@1530,3744.8 ; 1523,3770.71 cw(c1454.11,3770.71) 1502.82,3722 ccw(c1437.21,3787.61) D5.A@1530,3787.61 ; 1523,3771.36 cw(c1574.82,3771.36) D5.A@1538.18,3808 ; 1523,3900.64 ccw(c1574.82,3900.64) D5.A@1538.18,3864 ; D5.A@1530,3821 1530,3598 1680,3448 R2.2@1680,3380 1758.46,3380 C6.1@1775,3363.46 1935,3363.46 ; 1740.59,3380 cw(c1740.59,3331.03) C6.1@1775.22,3365.66 ; U3.7@2144.49,2920 C12.2@2310,2920 ; U5.1@2148,3707.88 2148,3560 2001.54,3413.54 2001.54,3363.46 ; C12.2@2310,2940 2315,2945 2315,3052.5 2207.5,3160 2205,3160 2001.54,3363.46 ; 1935,3363.46 2001.54,3363.46
  Bottom Layer w30: C8.1@1465,2650.47 cw(c1465,2615.4) 1489.8,2640.2 cw(c1514.6,2665) C8.1@1479.53,2665 ; C8.1@1465,2665 1513.46,2616.54 C9.1@1565,2616.54
  Bottom Layer w40: L2.1@1100,2790 1180,2710 1180,2625 1250,2555 1355,2555 C8.1@1465,2665
VCC-36: *1.2 C3.1 C4.1 Q2.D Q3.D Q4.D R6.2 U1.1 | length 5768.9
  Top Layer w50: 1415,3085 U1.1@1495,3085
  Top Layer w60: C4.1@1120,3800 1355,3565 1355,3145 1415,3085
  Bottom Layer w30: C3.1@1285,3730 cw(c1285,3693.79) 1310.61,3719.39 ; C3.1@1285,3745 1565,3465 1888,3465 R6.2@1931,3422 ; 1905.39,3447.61 ccw(c1931,3473.21) R6.2@1931,3437
  Bottom Layer w40: C4.1@1120,3800 1175,3745 C3.1@1285,3745
  Bottom Layer w80: Q3.D@1455.14,4806.86 1455.14,4910.14 1460,4915 ; Q2.D@3450,4810.28 Q2.D@3453.42,4806.86
  Bottom Layer w90: Q4.D@2454.28,4806.86 2455,4807.58 2455,4915 ; Q2.D@3450,4810.28 3450,4915
  Bottom Layer w100: C4.1@1120,3800 1285,3965 1285,4115 *1.2@1135,4265 1135,4815 1235,4915 1450.28,4915 1455.14,4910.14 ; 1460,4915 2455,4915 3450,4915
VREF: R43.1 R54.1 R59.1 U6.1 U6.2 U6.5 U6.10 U6.12 | length 2626.9
  Bottom Layer w10: R43.1@2292,4346.54 2677.06,4346.54 2847.31,4176.28 2847.31,4164.5 2908.81,4103 U6.5@2979.53,4103 3038,4103 ; R43.1@2302.38,4336.15 cw(c2327.45,4311.08) 2327.45,4346.54 cw(c2327.45,4381.99) R43.1@2302.38,4356.92 ; U6.5@2943.22,4098.18 ccw(c2931.59,4086.56) 2931.59,4103 ccw(c2931.59,4119.44) U6.5@2943.22,4107.82 ; U6.1@2974.71,3907.82 ccw(c2963.08,3919.44) 2979.53,3919.44 ccw(c2995.97,3919.44) U6.1@2984.34,3907.82 ; U6.2@2974.71,3948.18 cw(c2963.08,3936.56) 2979.53,3936.56 cw(c2995.97,3936.56) U6.2@2984.34,3948.18 ; U6.1@2979.53,3903 U6.2@2979.53,3953 3038,3953 3088,4003 U6.12@3138,4003 ; U6.2@3015.84,3948.18 cw(c3027.47,3936.56) 3027.47,3953 cw(c3027.47,3969.44) U6.2@3015.84,3957.82 ; U6.5@3015.84,4098.18 cw(c3027.47,4086.56) 3027.47,4103 cw(c3027.47,4119.44) U6.5@3015.84,4107.82 ; 3125.68,4015.32 ccw(c3138.98,4028.61) U6.12@3138.98,4009.81 ; 3128.04,4012.96 cw(c3118.08,4003) U6.12@3132.17,4003 ; U6.12@3134.16,3998.18 ccw(c3122.53,3986.56) 3122.53,4003 ccw(c3122.53,4019.44) U6.12@3134.16,4007.82 ; U6.10@3134.16,4098.18 ccw(c3122.53,4086.56) 3122.53,4103 ccw(c3122.53,4119.44) U6.10@3134.16,4107.82 ; U6.12@3170.47,4003 U6.12@3138,4003 ; U6.10@3206.78,4098.18 cw(c3218.41,4086.56) 3218.41,4103 cw(c3218.41,4119.44) U6.10@3206.78,4107.82 ; R54.1@3326,4353.88 cw(c3326,4313.68) 3354.43,4342.11 ; R54.1@3326,4370.54 3405,4291.54 R59.1@3584,4291.54 3395.46,4103 U6.10@3170.47,4103 3038,4103 ; R54.1@3340.68,4368.57 ccw(c3371.39,4368.57) 3349.68,4346.86 ; 3555.57,4263.11 cw(c3584,4234.68) R59.1@3584,4274.88 ; 3560.32,4267.86 ccw(c3538.61,4289.57) R59.1@3569.32,4289.57 ; R59.1@3573.62,4281.15 ccw(c3548.55,4256.08) 3548.55,4291.54 ccw(c3548.55,4326.99) R59.1@3573.62,4301.92 ; 3038,4103 U6.12@3138,4003
pads on no net: U1.6 U2.4 U3.0 U3.2 U3.3 U3.5 U4.2 U4.3 U4.4 U4.8 U4.50 U4.55 U4.56 U4.57 U4.61 U5.17 U5.21 U5.25
copper on no net:
  other v4: 2035,2870 2065,2870 2035,2905 2065,2905

## Polygon pours and split planes (outlines as drawn)
PGND on Bottom Layer "Bot Layer-GND" (solid, remove dead copper, pour order 15): 4316.6,5113.6 4348.6,5081.6 4348.6,2439.6 1049.6,2439.6 838.6,2650.6 915.6,2727.6 915.6,5101.6 4298.6,5101.6 4323.6,5126.6
GND on Bottom Layer "Bot Layer-GND" (solid, remove dead copper, pour order 7): 3116.07,3680.83 3629.07,3680.83 3644.07,3695.83 3672.07,3667.83 3672.07,3227.83 3162.07,3227.83 3126.07,3191.83 3122.07,3195.83 3122.07,3681.83
GND on Bottom Layer "Bot Layer-GND" (solid, remove dead copper, pour order 5): 3186,3186 3649,3186 3655,3180 3658,3177 3658,2764 3146,2764 3071,2839 3201,2969 3201,3183
PGND on Top Layer "Bot Layer-GND" (solid, remove dead copper, pour order 13): 938.39,5150.88 984.39,5104.88 984.39,2406.88 4413.39,2406.88 4529.39,2522.88 4402.39,2649.88 4402.39,5109.88 979.39,5109.88 938.39,5150.88
GND on Top Layer "Bot Layer-GND" (solid, remove dead copper, pour order 11): 3064.75,3792 3064.75,3115 3108.75,3071 3243.75,3206 3792.75,3206 3792.75,3299 3982.75,3489 3883.75,3588 3883.75,3794 3069.75,3794 3064.75,3799

## Keep-outs
Keep-Out Layer:
  lines w5: 4164,2495 ccw(c4166.5,2617.5) 4289,2615
  lines w10: 1005,4905 cw(c1110,4905) 1110,5010 4197,5010 cw(c4184.5,4902.5) 4292,4890 ; 1005,4920 1005,2610 ccw(c1115,2610) 1115,2500 4198,2500 ; 4166,2500 ccw(c4172.5,2616.5) 4289,2610 4289,4915

## Silkscreen, mask and mechanical layers (free items; w line width, h text height)
Top Overlay:
  drawing of 5774 lines, arcs and shapes, not listed
  text "HA_C" at 4124,4668 h30
  text "HA_B" at 4015,4233 h30 r90
  text "HA_A" at 4015,4092 h30 r90
  text "VCC" at 4018,3903 h30 r90
  text "C5" at 3781,3893 h30
  text "B0" at 3780,3779 h30
  text "vcc" at 4097,3520 h30 r90
  text "dio" at 4125,3442 h30 r90
  text "clk" at 4127,3332 h30 r90
  text "br_1" at 3974,3136 h30
  text "mosi" at 4131,3115 h30 r90
  text "miso" at 4129,2995 h30 r90
  text "br_2" at 3954,2909 h30 r90
  text "sck" at 4130,2900 h30 r90
  text "nss" at 4130,2800 h30 r90
  text "gnd" at 4133,2696 h30 r90
  text "VCC" at 2135,2675 h30
  text "gnd" at 2891,2652 h30
  text "rx" at 2999,2651 h30
  text "tx" at 3077,2651 h30
  text "vcc" at 2797,2648 h30
  text "liju" at 3573,2601 h30
  text "GND" at 2099,2544 h30
  text "speed" at 3335,2517 h30
  text "fre" at 3232,2515 h30
Bottom Overlay:
  drawing of 5967 lines, arcs and shapes, not listed
Bottom Solder:
  lines w80: 1455.14,4806.86 1456,4807.72 1456,4920
  lines w90: 1555.14,4806.86 1555.14,4603.86 1574,4585 1792,4585 1954.71,4747.71 1954.71,4806.86 ; 1570,4599 1613,4599 1654,4640 ; 2054.71,4806.86 2054.71,4476.29 2055,4476 ; 2454,4910 2454,4807.14 2454.28,4806.86 ; 2554,4621 2554.28,4621.28 2554.28,4806.86 ; 2604,4608 2861,4608 2953.85,4700.85 2953.85,4806.86 ; 3053.85,4806.86 3053.85,4493.15 3065,4482 ; 3553.42,4806.86 3553.42,4642.58 3564,4632 ; 3576,4618 3848,4618 3953,4723 3953,4806.86 ; 4046,4504 4053,4511 4053,4806.86
  lines w100: 1120,3800 1283,3963 1283,4117 1135,4265 ; 1135,4274 1135,4265 ; 3453.42,4806.86 3453.42,4912.58 3451,4915 1237,4915 1135,4813 1135,4265

## Dimensions
895,5000 to 675,2515 on Top Overlay
1000,5205 to 4180,5290 on Top Overlay

## Text inside footprints (layer, text, board x,y; h text height)
*1: Top Overlay "1" at 1085,4065 h30 r90; Top Overlay "2" at 1085,4265 h30 r90
*4: Top Overlay "1" at 4215,4542 h30 r270; Top Overlay "2" at 4215,4342 h30 r270; Top Overlay "3" at 4220,4161 h30 r270; Top Overlay "4" at 4223,3978 h30 r270; Top Overlay "5" at 4222,3781 h30 r270
U2: Bottom Overlay "1" at 2452.06,3225.97 h30 r90; Bottom Overlay "3" at 2452.06,3045.97 h30 r90